# EAGLE board HeadMouse_2 (EAGLE 9.4.2)
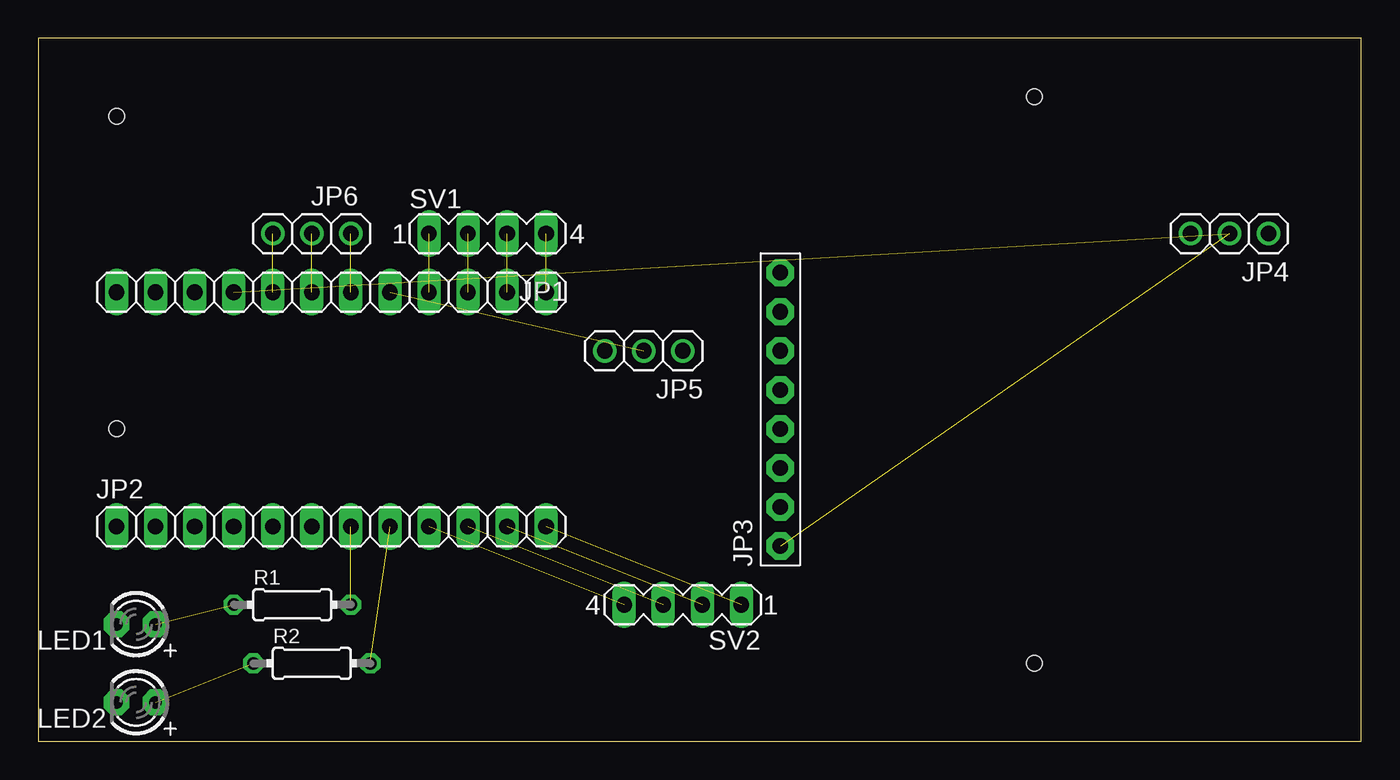
[diagram p0: board, top side]
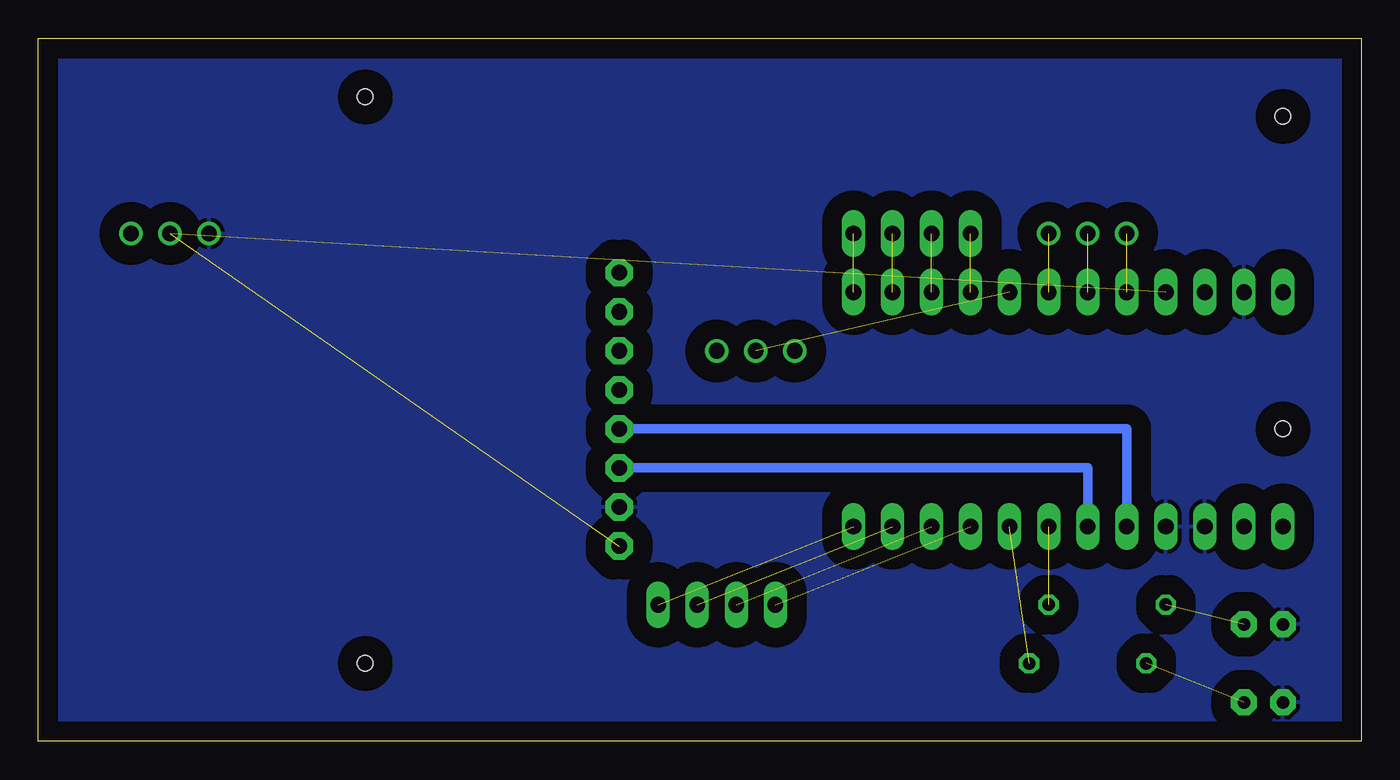
[diagram p1: board, bottom side, seen from below]

Size 86.03 x 45.71 mm. Coordinates in mm from the lower left corner, seen from the top.
Outline: 0,0 86.03,0 86.03,45.71 0,45.71 0,0
Copper layers (1*16): Top 0.035mm / dielectric 1.5mm / Bottom 0.035mm
Design rules "default": minimum track width 6mil, minimum drill 0.35mm, track to track 6mil, track to pad 6mil, pad to pad 6mil, via to via 6mil, smd to smd 6mil, copper to edge 40mil, drill to drill 6mil, minimum pad ring 10mil, minimum via ring 8mil, stop-mask expansion 4mil, vias tented up to drill 0mil, thermal gap 10mil
Holes 1 mm at 64.77,41.91 64.77,5.08 5.08,40.64 5.08,20.32

## Footprints (pad centres in the part's own frame; a part is rotated, then mirrored left to right if it is on the bottom)
1X12 = drill 1.016 long: 1 -13.97,0; 2 -11.43,0; 3 -8.89,0; 4 -6.35,0; 5 -3.81,0; 6 -1.27,0; 7 1.27,0; 8 3.81,0; 9 6.35,0; 10 8.89,0; 11 11.43,0; 12 13.97,0
1X08-BIG = drill 1.016 pad 1.778 octagon: 1 -8.89,0; 2 -6.35,0; 3 -3.81,0; 4 -1.27,0; 5 1.27,0; 6 3.81,0; 7 6.35,0; 8 8.89,0
1X03 = drill 1.016: 1 -2.54,0; 2 0,0; 3 2.54,0
LED3MM = drill 0.813 pad 1.676 octagon: A -1.27,0; K 1.27,0
0204/7 = drill 0.813 octagon: 1 -3.81,0; 2 3.81,0
MA04-1 = drill 1.016 long: 1 -3.81,0; 2 -1.27,0; 3 1.27,0; 4 3.81,0

## Placement (x,y rotation side)
JP1  [1X12]  19.05,29.21 180 top
JP2  [1X12]  19.05,13.97 0 top
JP3  [1X08-BIG]  48.26,21.59 90 top
JP4  [1X03]  77.47,33.02 180 top
JP5  [1X03]  39.37,25.4 180 top
JP6  [1X03]  17.78,33.02 0 top
LED1  [LED3MM]  6.35,7.62 180 top
LED2  [LED3MM]  6.35,2.54 180 top
R1  [0204/7]  16.51,8.89 0 top
R2  [0204/7]  17.78,5.08 0 top
SV1  [MA04-1]  29.21,33.02 0 top
SV2  [MA04-1]  41.91,8.89 180 top

## Library data of the parts
JP1-JP6 LED1 LED2 = adafruit
R1 R2 = rcl; SPICEPREFIX: R
SV1 SV2 = con-lstb; OC_FARNELL: unknown; OC_NEWARK: unknown

## Nets
+5V: JP1.9 JP3.1 JP4.2
GND: JP1.11 JP2.3 JP2.4 JP3.2 JP4.3 LED1.K LED2.K
N$1: JP2.5 JP3.4
N$2: JP2.8 R2.2
N$3: LED1.A R1.1
N$4: LED2.A R2.1
N$5: JP2.7 R1.2
N$6: JP2.6 JP3.3
N$7: JP1.8 JP6.1
N$8: JP1.7 JP6.2
N$9: JP1.6 JP6.3
N$10: JP1.4 SV1.1
N$11: JP1.3 SV1.2
N$12: JP1.2 SV1.3
N$13: JP1.1 SV1.4
N$14: JP2.9 SV2.4
N$15: JP2.10 SV2.3
N$16: JP2.11 SV2.2
N$17: JP2.12 SV2.1
PRES: JP1.5 JP5.2

## Tracks (layer width: path | path; a pad name or v marks a point on that pad's centre or on a via)
+5V  (2 unrouted)
GND
  pour Bottom (isolate 1.27): 1.27,44.45 85.09,44.45 85.09,1.27 1.27,1.27
N$1
  Bottom 0.61: JP2.5 15.24,20.32 JP3.4
N$2  (1 unrouted)
N$3  (1 unrouted)
N$4  (1 unrouted)
N$5  (1 unrouted)
N$6
  Bottom 0.61: JP2.6 17.78,17.78 JP3.3
N$7  (1 unrouted)
N$8  (1 unrouted)
N$9  (1 unrouted)
N$10  (1 unrouted)
N$11  (1 unrouted)
N$12  (1 unrouted)
N$13  (1 unrouted)
N$14  (1 unrouted)
N$15  (1 unrouted)
N$16  (1 unrouted)
N$17  (1 unrouted)
PRES  (1 unrouted)